# EAGLE board BadUSB-Panel (EAGLE 9.3.0), part 1 of 2
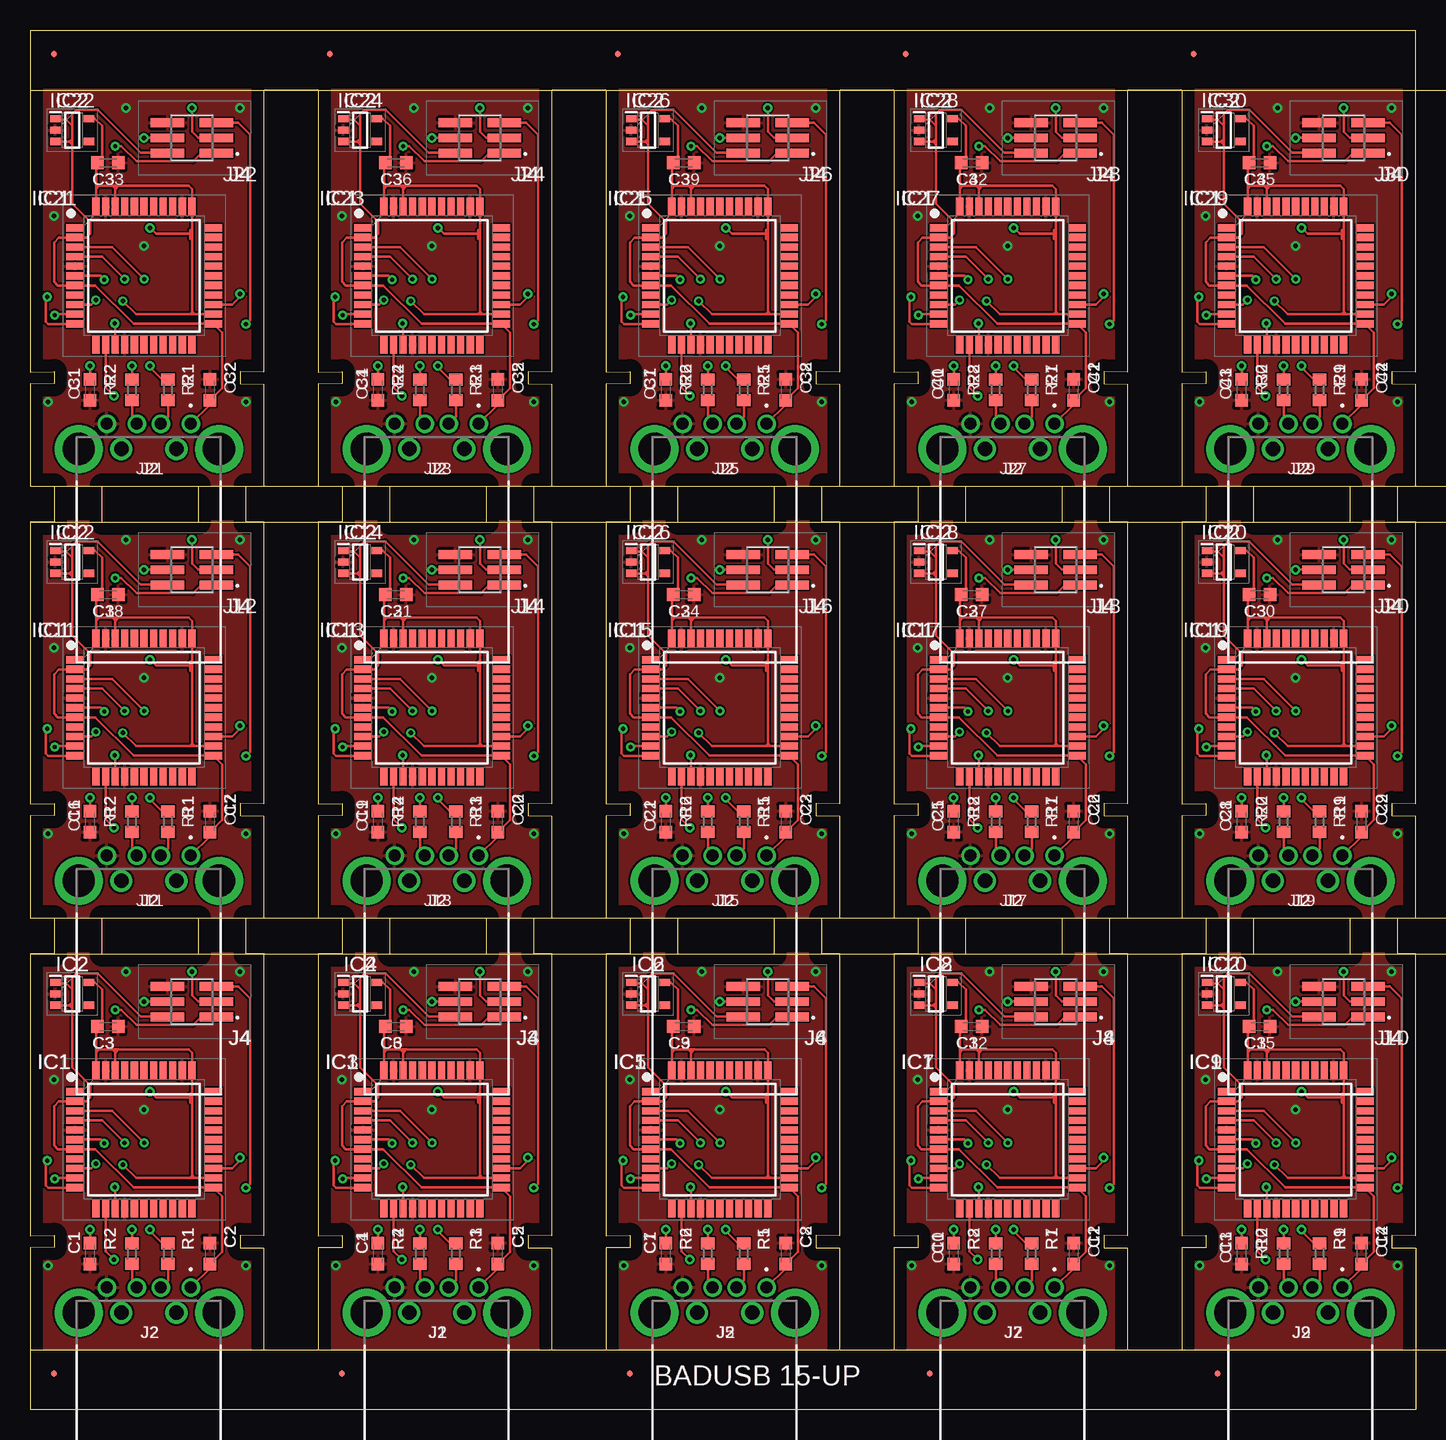
[diagram p0: board, top side]
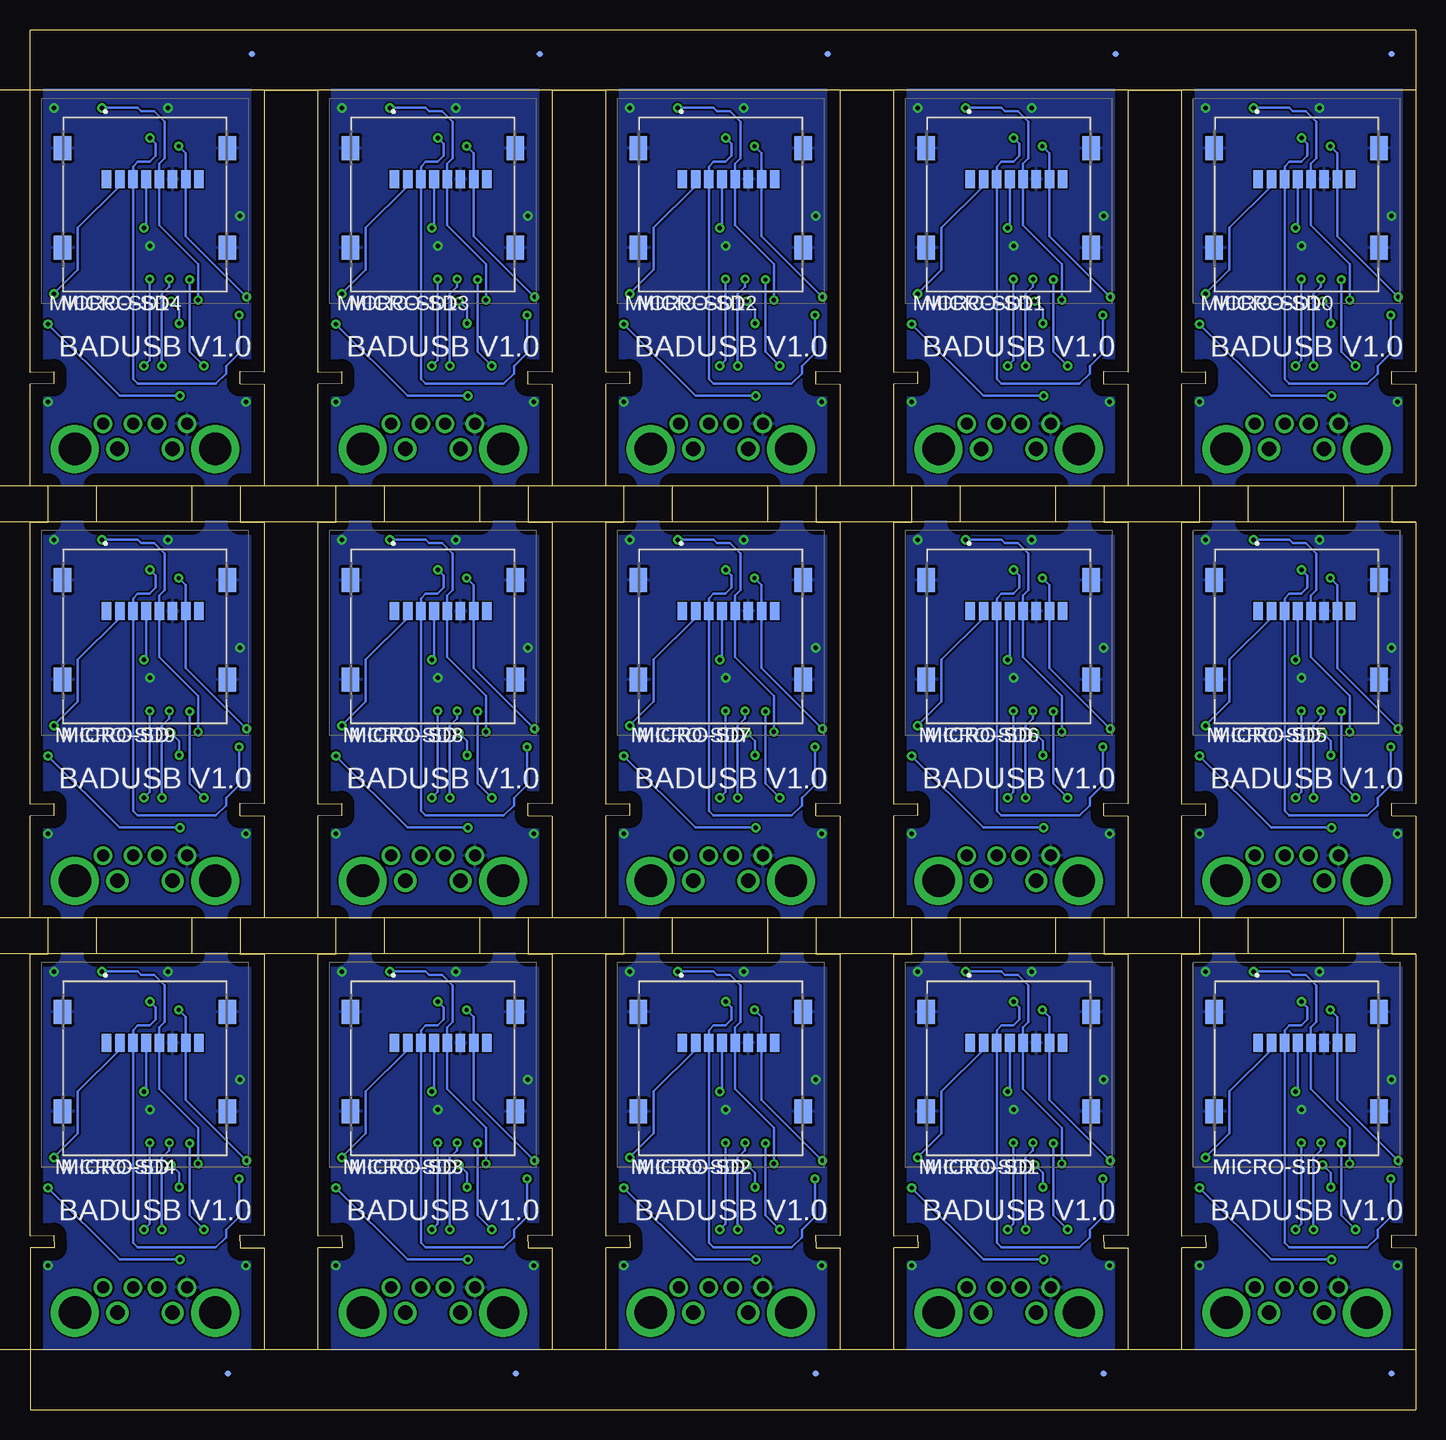
[diagram p1: board, bottom side, seen from below]

Size 115.5 x 115 mm. Coordinates in mm from the lower left corner, seen from the top.
Outline: 19.5,14.5 17.5,14.5 17.5,13.5 19.5,13.5 19.5,5 24,5 24,13.5 26,13.5 26,14.5 24,14.5 24,38 26,38 26,41 24,41 24,49.5 26,49.5 26,50.5 24,50.5 24,74 26,74 26,77 24,77 24,85.5 26,85.5 26,86.5 24,86.5 24,110 19.5,110 19.5,86.5 17.5,86.5 17.5,85.5 19.5,85.5 19.5,77 18,77 18,74 19.5,74 19.5,50.5 17.5,50.5 17.5,49.5 19.5,49.5 19.5,41 18,41 18,38 19.5,38 19.5,14.5
Outline: 0,14.5 2,14.5 2,13.5 0,13.5 0,0 115.5,0 115.5,13.5 113.5,13.5 113.5,14.5 115.5,14.5 115.5,38 114,38 114,41 115.5,41 115.5,49.5 113.5,49.5 113.5,50.5 115.5,50.5 115.5,74 114,74 114,77 115.5,77 115.5,85.5 113.5,85.5 113.5,86.5 115.5,86.5 115.5,115 0,115 0,86.5 2,86.5 2,85.5 0,85.5 0,77 2,77 2,74 0,74 0,50.5 2,50.5 2,49.5 0,49.5 0,41 2,41 2,38 0,38 0,14.5
Outline: 43.5,14.5 41.5,14.5 41.5,13.5 43.5,13.5 43.5,5 48,5 48,13.5 50,13.5 50,14.5 48,14.5 48,38 50,38 50,41 48,41 48,49.5 50,49.5 50,50.5 48,50.5 48,74 50,74 50,77 48,77 48,85.5 50,85.5 50,86.5 48,86.5 48,110 43.5,110 43.5,86.5 41.5,86.5 41.5,85.5 43.5,85.5 43.5,77 42,77 42,74 43.5,74 43.5,50.5 41.5,50.5 41.5,49.5 43.5,49.5 43.5,41 42,41 42,38 43.5,38 43.5,14.5
Outline: 67.5,14.5 65.5,14.5 65.5,13.5 67.5,13.5 67.5,5 72,5 72,13.5 74,13.5 74,14.5 72,14.5 72,38 74,38 74,41 72,41 72,49.5 74,49.5 74,50.5 72,50.5 72,74 74,74 74,77 72,77 72,85.5 74,85.5 74,86.5 72,86.5 72,110 67.5,110 67.5,86.5 65.5,86.5 65.5,85.5 67.5,85.5 67.5,77 66,77 66,74 67.5,74 67.5,50.5 65.5,50.5 65.5,49.5 67.5,49.5 67.5,41 66,41 66,38 67.5,38 67.5,14.5
Outline: 91.5,14.5 89.5,14.5 89.5,13.5 91.5,13.5 91.5,5 96,5 96,13.5 98,13.5 98,14.5 96,14.5 96,38 98,38 98,41 96,41 96,49.5 98,49.5 98,50.5 96,50.5 96,74 98,74 98,77 96,77 96,85.5 98,85.5 98,86.5 96,86.5 96,110 91.5,110 91.5,86.5 89.5,86.5 89.5,85.5 91.5,85.5 91.5,77 90,77 90,74 91.5,74 91.5,50.5 89.5,50.5 89.5,49.5 91.5,49.5 91.5,41 90,41 90,38 91.5,38 91.5,14.5
Outline: 6,74 6,77 14,77 14,74 6,74
Outline: 6,38 6,41 14,41 14,38 6,38
Outline: 30,74 30,77 38,77 38,74 30,74
Outline: 30,38 30,41 38,41 38,38 30,38
Outline: 54,74 54,77 62,77 62,74 54,74
Outline: 54,38 54,41 62,41 62,38 54,38
Outline: 78,74 78,77 86,77 86,74 78,74
Outline: 78,38 78,41 86,41 86,38 78,38
Outline: 102,38 102,41 110,41 110,38 102,38
Outline: 102,74 102,77 110,77 110,74 102,74
Copper layers (1*16): Top 0.035mm / dielectric 1.5mm / Bottom 0.035mm
Design rules "default": minimum track width 6mil, minimum drill 0.35mm, track to track 6mil, track to pad 6mil, pad to pad 6mil, via to via 6mil, smd to smd 6mil, copper to edge 40mil, drill to drill 6mil, minimum pad ring 10mil, minimum via ring 8mil, stop-mask expansion 4mil, vias tented up to drill 0mil, thermal gap 10mil
Milling: 6 lines

## Footprints (pad centres in the part's own frame; a part is rotated, then mirrored left to right if it is on the bottom)
C0603K = smd 1.05 x 1.08: 1 -0.875,0; 2 0.875,0
FID_020 = smd 0.508 x 0.508 bottom: FIDB 0,0 | smd 0.508 x 0.508: FIDT 0,0
QFP80P1200X1200X120-44N = smd 1.5 x 0.6: 1 -5.75,4; 2 -5.75,3.2; 3 -5.75,2.4; 4 -5.75,1.6; 5 -5.75,0.8; 6 -5.75,0; 7 -5.75,-0.8; 8 -5.75,-1.6; 9 -5.75,-2.4; 10 -5.75,-3.2; 11 -5.75,-4; 23 5.75,-4; 24 5.75,-3.2; 25 5.75,-2.4; 26 5.75,-1.6; 27 5.75,-0.8; 28 5.75,0; 29 5.75,0.8; 30 5.75,1.6; 31 5.75,2.4; 32 5.75,3.2; 33 5.75,4 | smd 0.6 x 1.5: 12 -4,-5.75; 13 -3.2,-5.75; 14 -2.4,-5.75; 15 -1.6,-5.75; 16 -0.8,-5.75; 17 0,-5.75; 18 0.8,-5.75; 19 1.6,-5.75; 20 2.4,-5.75; 21 3.2,-5.75; 22 4,-5.75; 34 4,5.75; 35 3.2,5.75; 36 2.4,5.75; 37 1.6,5.75; 38 0.8,5.75; 39 0,5.75; 40 -0.8,5.75; 41 -1.6,5.75; 42 -2.4,5.75; 43 -3.2,5.75; 44 -4,5.75
SOT95P280X130-5N = smd 0.9 x 0.6: 1 -1.4,0.95; 2 -1.4,0; 3 -1.4,-0.95; 4 1.4,-0.95; 5 1.4,0.95
UP2-AH-1-TH = drill 1 pad 1.55: 1 3.5,19.9; 2 1,19.9; 3 -1,19.9; 4 -3.5,19.9 | drill 1.2 pad 1.85: 5 -2.3,17.8; 6 2.3,17.8 | drill 2.7 pad 4: 7 5.85,17.8; 8 -5.85,17.8
FTS-103-YY-XX-DV-TR = smd 0.74 x 2.79: 1 -1.27,-2.035; 2 -1.27,2.035; 3 0,-2.035; 4 0,2.035; 5 1.27,-2.035; 6 1.27,2.035
472192001 = smd 0.8 x 1.5: 1 3.205,-1.8; 2 2.105,-1.8; 3 1.005,-1.8; 4 -0.095,-1.8; 5 -1.195,-1.8; 6 -2.295,-1.8; 7 -3.395,-1.8; 8 -4.495,-1.8 | smd 1.45 x 2: 9 -6.875,-4.4; 10 -6.875,3.9; 11 6.875,3.9; 12 6.875,-4.4
R0603 = smd 1 x 1.1: 1 -0.85,0; 2 0.85,0

## Placement (x,y rotation side)
C1  1uF  [C0603K]  5,13 270 top
C2  10uF  [C0603K]  15,13 90 top
C3  10uF  [C0603K]  6.49,31.92 0 top
C4  1uF  [C0603K]  29,13 270 top
C5  10uF  [C0603K]  39,13 90 top
C6  10uF  [C0603K]  30.49,31.92 0 top
C7  1uF  [C0603K]  53,13 270 top
C8  10uF  [C0603K]  63,13 90 top
C9  10uF  [C0603K]  54.49,31.92 0 top
C10  1uF  [C0603K]  77,13 270 top
C11  10uF  [C0603K]  87,13 90 top
C12  10uF  [C0603K]  78.49,31.92 0 top
C13  1uF  [C0603K]  101,13 270 top
C14  10uF  [C0603K]  111,13 90 top
C15  10uF  [C0603K]  102.49,31.92 0 top
C16  1uF  [C0603K]  5,49 270 top
C17  10uF  [C0603K]  15,49 90 top
C18  10uF  [C0603K]  6.49,67.92 0 top
C19  1uF  [C0603K]  29,49 270 top
C20  10uF  [C0603K]  39,49 90 top
C21  10uF  [C0603K]  30.49,67.92 0 top
C22  1uF  [C0603K]  53,49 270 top
C23  10uF  [C0603K]  63,49 90 top
C24  10uF  [C0603K]  54.49,67.92 0 top
C25  1uF  [C0603K]  77,49 270 top
C26  10uF  [C0603K]  87,49 90 top
C27  10uF  [C0603K]  78.49,67.92 0 top
C28  1uF  [C0603K]  101,49 270 top
C29  10uF  [C0603K]  111,49 90 top
C30  10uF  [C0603K]  102.49,67.92 0 top
C31  1uF  [C0603K]  5,85 270 top
C32  10uF  [C0603K]  15,85 90 top
C33  10uF  [C0603K]  6.49,103.92 0 top
C34  1uF  [C0603K]  29,85 270 top
C35  10uF  [C0603K]  39,85 90 top
C36  10uF  [C0603K]  30.49,103.92 0 top
C37  1uF  [C0603K]  53,85 270 top
C38  10uF  [C0603K]  63,85 90 top
C39  10uF  [C0603K]  54.49,103.92 0 top
C40  1uF  [C0603K]  77,85 270 top
C41  10uF  [C0603K]  87,85 90 top
C42  10uF  [C0603K]  78.49,103.92 0 top
C43  1uF  [C0603K]  101,85 270 top
C44  10uF  [C0603K]  111,85 90 top
C45  10uF  [C0603K]  102.49,103.92 0 top
E$1  [FID_020]  2,113 0 top
E$2  [FID_020]  25,113 0 top
E$3  [FID_020]  49,113 0 top
E$4  [FID_020]  73,113 0 top
E$5  [FID_020]  97,113 0 top
E$6  [FID_020]  2,3 0 top
E$7  [FID_020]  26,3 0 top
E$8  [FID_020]  50,3 0 top
E$9  [FID_020]  75,3 0 top
E$10  [FID_020]  99,3 0 top
IC1  ATMEGA32U4-AUR  [QFP80P1200X1200X120-44N]  9.5,22.5 0 top
IC2  XC6219A332MR-G  [SOT95P280X130-5N]  3.52,34.65 0 top
IC3  ATMEGA32U4-AUR  [QFP80P1200X1200X120-44N]  33.5,22.5 0 top
IC4  XC6219A332MR-G  [SOT95P280X130-5N]  27.52,34.65 0 top
IC5  ATMEGA32U4-AUR  [QFP80P1200X1200X120-44N]  57.5,22.5 0 top
IC6  XC6219A332MR-G  [SOT95P280X130-5N]  51.52,34.65 0 top
IC7  ATMEGA32U4-AUR  [QFP80P1200X1200X120-44N]  81.5,22.5 0 top
IC8  XC6219A332MR-G  [SOT95P280X130-5N]  75.52,34.65 0 top
IC9  ATMEGA32U4-AUR  [QFP80P1200X1200X120-44N]  105.5,22.5 0 top
IC10  XC6219A332MR-G  [SOT95P280X130-5N]  99.52,34.65 0 top
IC11  ATMEGA32U4-AUR  [QFP80P1200X1200X120-44N]  9.5,58.5 0 top
IC12  XC6219A332MR-G  [SOT95P280X130-5N]  3.52,70.65 0 top
IC13  ATMEGA32U4-AUR  [QFP80P1200X1200X120-44N]  33.5,58.5 0 top
IC14  XC6219A332MR-G  [SOT95P280X130-5N]  27.52,70.65 0 top
IC15  ATMEGA32U4-AUR  [QFP80P1200X1200X120-44N]  57.5,58.5 0 top
IC16  XC6219A332MR-G  [SOT95P280X130-5N]  51.52,70.65 0 top
IC17  ATMEGA32U4-AUR  [QFP80P1200X1200X120-44N]  81.5,58.5 0 top
IC18  XC6219A332MR-G  [SOT95P280X130-5N]  75.52,70.65 0 top
IC19  ATMEGA32U4-AUR  [QFP80P1200X1200X120-44N]  105.5,58.5 0 top
IC20  XC6219A332MR-G  [SOT95P280X130-5N]  99.52,70.65 0 top
IC21  ATMEGA32U4-AUR  [QFP80P1200X1200X120-44N]  9.5,94.5 0 top
IC22  XC6219A332MR-G  [SOT95P280X130-5N]  3.52,106.65 0 top
IC23  ATMEGA32U4-AUR  [QFP80P1200X1200X120-44N]  33.5,94.5 0 top
IC24  XC6219A332MR-G  [SOT95P280X130-5N]  27.52,106.65 0 top
IC25  ATMEGA32U4-AUR  [QFP80P1200X1200X120-44N]  57.5,94.5 0 top
IC26  XC6219A332MR-G  [SOT95P280X130-5N]  51.52,106.65 0 top
IC27  ATMEGA32U4-AUR  [QFP80P1200X1200X120-44N]  81.5,94.5 0 top
IC28  XC6219A332MR-G  [SOT95P280X130-5N]  75.52,106.65 0 top
IC29  ATMEGA32U4-AUR  [QFP80P1200X1200X120-44N]  105.5,94.5 0 top
IC30  XC6219A332MR-G  [SOT95P280X130-5N]  99.52,106.65 0 top
J1  UP2-AH-1-TH  [UP2-AH-1-TH]  33.91,-9.73 0 top
J2  UP2-AH-1-TH  [UP2-AH-1-TH]  9.91,-9.73 0 top
J3  FTS-103-01-L-DV-TR  [FTS-103-YY-XX-DV-TR]  37.5,34 90 top
J4  FTS-103-01-L-DV-TR  [FTS-103-YY-XX-DV-TR]  13.5,34 90 top
J5  UP2-AH-1-TH  [UP2-AH-1-TH]  57.91,-9.73 0 top
J6  FTS-103-01-L-DV-TR  [FTS-103-YY-XX-DV-TR]  61.5,34 90 top
J7  UP2-AH-1-TH  [UP2-AH-1-TH]  81.91,-9.73 0 top
J8  FTS-103-01-L-DV-TR  [FTS-103-YY-XX-DV-TR]  85.5,34 90 top
J9  UP2-AH-1-TH  [UP2-AH-1-TH]  105.91,-9.73 0 top
J10  FTS-103-01-L-DV-TR  [FTS-103-YY-XX-DV-TR]  109.5,34 90 top
J11  UP2-AH-1-TH  [UP2-AH-1-TH]  9.91,26.27 0 top
J12  FTS-103-01-L-DV-TR  [FTS-103-YY-XX-DV-TR]  13.5,70 90 top
J13  UP2-AH-1-TH  [UP2-AH-1-TH]  33.91,26.27 0 top
J14  FTS-103-01-L-DV-TR  [FTS-103-YY-XX-DV-TR]  37.5,70 90 top
J15  UP2-AH-1-TH  [UP2-AH-1-TH]  57.91,26.27 0 top
J16  FTS-103-01-L-DV-TR  [FTS-103-YY-XX-DV-TR]  61.5,70 90 top
J17  UP2-AH-1-TH  [UP2-AH-1-TH]  81.91,26.27 0 top
J18  FTS-103-01-L-DV-TR  [FTS-103-YY-XX-DV-TR]  85.5,70 90 top
J19  UP2-AH-1-TH  [UP2-AH-1-TH]  105.91,26.27 0 top
J20  FTS-103-01-L-DV-TR  [FTS-103-YY-XX-DV-TR]  109.5,70 90 top
J21  UP2-AH-1-TH  [UP2-AH-1-TH]  9.91,62.27 0 top
J22  FTS-103-01-L-DV-TR  [FTS-103-YY-XX-DV-TR]  13.5,106 90 top
J23  UP2-AH-1-TH  [UP2-AH-1-TH]  33.91,62.27 0 top
J24  FTS-103-01-L-DV-TR  [FTS-103-YY-XX-DV-TR]  37.5,106 90 top
J25  UP2-AH-1-TH  [UP2-AH-1-TH]  57.91,62.27 0 top
J26  FTS-103-01-L-DV-TR  [FTS-103-YY-XX-DV-TR]  61.5,106 90 top
J27  UP2-AH-1-TH  [UP2-AH-1-TH]  81.91,62.27 0 top
J28  FTS-103-01-L-DV-TR  [FTS-103-YY-XX-DV-TR]  85.5,106 90 top
J29  UP2-AH-1-TH  [UP2-AH-1-TH]  105.91,62.27 0 top
J30  FTS-103-01-L-DV-TR  [FTS-103-YY-XX-DV-TR]  109.5,106 90 top
MICRO-SD  47219-2001  [472192001]  9.91,28.75 180 bottom
MICRO-SD1  47219-2001  [472192001]  33.91,28.75 180 bottom
MICRO-SD2  47219-2001  [472192001]  57.91,28.75 180 bottom
MICRO-SD3  47219-2001  [472192001]  81.91,28.75 180 bottom
MICRO-SD4  47219-2001  [472192001]  105.91,28.75 180 bottom
MICRO-SD5  47219-2001  [472192001]  9.91,64.75 180 bottom
MICRO-SD6  47219-2001  [472192001]  33.91,64.75 180 bottom
MICRO-SD7  47219-2001  [472192001]  57.91,64.75 180 bottom
MICRO-SD8  47219-2001  [472192001]  81.91,64.75 180 bottom
MICRO-SD9  47219-2001  [472192001]  105.91,64.75 180 bottom
MICRO-SD10  47219-2001  [472192001]  9.91,100.75 180 bottom
MICRO-SD11  47219-2001  [472192001]  33.91,100.75 180 bottom
MICRO-SD12  47219-2001  [472192001]  57.91,100.75 180 bottom
MICRO-SD13  47219-2001  [472192001]  81.91,100.75 180 bottom
MICRO-SD14  47219-2001  [472192001]  105.91,100.75 180 bottom
R1  22R  [R0603]  11.5,13 270 top
R2  22R  [R0603]  8.5,13 90 top
R3  22R  [R0603]  35.5,13 270 top
R4  22R  [R0603]  32.5,13 90 top
R5  22R  [R0603]  59.5,13 270 top
R6  22R  [R0603]  56.5,13 90 top
R7  22R  [R0603]  83.5,13 270 top
R8  22R  [R0603]  80.5,13 90 top
R9  22R  [R0603]  107.5,13 270 top
R10  22R  [R0603]  104.5,13 90 top
R11  22R  [R0603]  11.5,49 270 top
R12  22R  [R0603]  8.5,49 90 top
R13  22R  [R0603]  35.5,49 270 top
R14  22R  [R0603]  32.5,49 90 top
R15  22R  [R0603]  59.5,49 270 top
R16  22R  [R0603]  56.5,49 90 top
R17  22R  [R0603]  83.5,49 270 top
R18  22R  [R0603]  80.5,49 90 top
R19  22R  [R0603]  107.5,49 270 top
R20  22R  [R0603]  104.5,49 90 top
R21  22R  [R0603]  11.5,85 270 top
R22  22R  [R0603]  8.5,85 90 top
R23  22R  [R0603]  35.5,85 270 top
R24  22R  [R0603]  32.5,85 90 top
R25  22R  [R0603]  59.5,85 270 top
R26  22R  [R0603]  56.5,85 90 top
R27  22R  [R0603]  83.5,85 270 top
R28  22R  [R0603]  80.5,85 90 top
R29  22R  [R0603]  107.5,85 270 top
R30  22R  [R0603]  104.5,85 90 top

## Library data of the parts
C1-C45 = rcl; SPICEPREFIX: C
E$1-E$10 = fid
IC1 IC3 IC5 IC7 IC9 IC11 IC13 IC15 IC17 IC19 IC21 IC23 IC25 IC27 IC29 = ATMEGA32U4-AUR; ARROW_PART_NUMBER: ATMEGA32U4-AUR; ARROW_PRICE-STOCK: https://www.arrow.com/en/products/atmega32u4-aur/microchip-technology; DESCRIPTION: 8-bit Microcontrollers - MCU USB 32K Flash 16 MHz; HEIGHT: 1.2mm; MANUFACTURER_NAME: Microchip; MANUFACTURER_PART_NUMBER: ATMEGA32U4-AUR; MOUSER_PART_NUMBER: 556-ATMEGA32U4-AUR; MOUSER_PRICE-STOCK: https://www.mouser.co.uk/ProductDetail/Microchip-Technology-Atmel/ATMEGA32U4-AUR?qs=rBGENRD8NwIbVIAimLns%252BA%3D%3D
IC2 IC4 IC6 IC8 IC10 IC12 IC14 IC16 IC18 IC20 IC22 IC24 IC26 IC28 IC30 = XC6219A332MR-G; DESCRIPTION: LDO Voltage Regulators 300mA High Speed Votage Regulator; HEIGHT: 1.3mm; MANUFACTURER_NAME: Torex; MANUFACTURER_PART_NUMBER: XC6219A332MR-G; MOUSER_PART_NUMBER: 865-XC6219A332MR-G; MOUSER_PRICE-STOCK: https://www.mouser.co.uk/ProductDetail/Torex-Semiconductor/XC6219A332MR-G?qs=AsjdqWjXhJ%2FqZhqmpYowVg%3D%3D
J1 J2 J5 J7 J9 J11 J13 J15 J17 J19 J21 J23 J25 J27 J29 = UP2-AH-1-TH; ARROW_PART_NUMBER: UP2-AH-1-TH; ARROW_PRICE-STOCK: https://www.arrow.com/en/products/up2-ah-1-th/cui-devices; DESCRIPTION: USB Connectors USB 2.0 type A plug 4 pin Horizontal TH; HEIGHT: mm; MANUFACTURER_NAME: CUI Devices; MANUFACTURER_PART_NUMBER: UP2-AH-1-TH; MOUSER_PART_NUMBER: 490-UP2-AH-1-TH; MOUSER_PRICE-STOCK: https://www.mouser.co.uk/ProductDetail/CUI-Devices/UP2-AH-1-TH?qs=5mqXD9RfOg0slNuu3mCk4w%3D%3D
J3 J4 J6 J8 J10 J12 J14 J16 J18 J20 J22 J24 J26 J28 J30 = FTS-103-01-L-DV-TR; ARROW_PART_NUMBER: FTS-103-01-L-DV-TR; ARROW_PRICE-STOCK: https://www.arrow.com/en/products/fts-103-01-l-dv-tr/samtec; DESCRIPTION: 6 Position, Micro Low Profile Header Strip, Double-Row, Vertical Surface Mount; HEIGHT: mm; MANUFACTURER_NAME: SAMTEC; MANUFACTURER_PART_NUMBER: FTS-103-01-L-DV-TR; MOUSER_PART_NUMBER: 200-FTS10301LDVTR; MOUSER_PRICE-STOCK: https://www.mouser.co.uk/ProductDetail/Samtec/FTS-103-01-L-DV-TR?qs=0lQeLiL1qyZdQ0modVbSfg%3D%3D
MICRO-SD MICRO-SD1-MICRO-SD14 = 47219-2001; DESCRIPTION: Molex 47219 Series 8 Way Horizontal Hinged Micro SD Memory Card Connector with Solder Termination; HEIGHT: mm; MANUFACTURER_NAME: Molex; MANUFACTURER_PART_NUMBER: 47219-2001; MOUSER_PART_NUMBER: 538-47219-2001; MOUSER_PRICE-STOCK: https://www.mouser.co.uk/ProductDetail/Molex/47219-2001?qs=6kT3pPPHxnVaoXw6Dd7beQ%3D%3D
R1-R30 = rcl; SPICEPREFIX: R

## Nets
+3V1: C6.1 IC3.14 IC3.24 IC3.34 IC3.42 IC3.44 IC4.5 MICRO-SD1.4
+3V2: C9.1 IC5.14 IC5.24 IC5.34 IC5.42 IC5.44 IC6.5 MICRO-SD2.4
+3V3: C3.1 IC1.14 IC1.24 IC1.34 IC1.42 IC1.44 IC2.5 MICRO-SD.4
+3V4: C12.1 IC7.14 IC7.24 IC7.34 IC7.42 IC7.44 IC8.5 MICRO-SD3.4
+3V5: C15.1 IC9.14 IC9.24 IC9.34 IC9.42 IC9.44 IC10.5 MICRO-SD4.4
+3V6: C18.1 IC11.14 IC11.24 IC11.34 IC11.42 IC11.44 IC12.5 MICRO-SD5.4
+3V7: C21.1 IC13.14 IC13.24 IC13.34 IC13.42 IC13.44 IC14.5 MICRO-SD6.4
+3V8: C24.1 IC15.14 IC15.24 IC15.34 IC15.42 IC15.44 IC16.5 MICRO-SD7.4
+3V9: C27.1 IC17.14 IC17.24 IC17.34 IC17.42 IC17.44 IC18.5 MICRO-SD8.4
+3V10: C30.1 IC19.14 IC19.24 IC19.34 IC19.42 IC19.44 IC20.5 MICRO-SD9.4
+3V11: C33.1 IC21.14 IC21.24 IC21.34 IC21.42 IC21.44 IC22.5 MICRO-SD10.4
+3V12: C36.1 IC23.14 IC23.24 IC23.34 IC23.42 IC23.44 IC24.5 MICRO-SD11.4
+3V13: C39.1 IC25.14 IC25.24 IC25.34 IC25.42 IC25.44 IC26.5 MICRO-SD12.4
+3V14: C42.1 IC27.14 IC27.24 IC27.34 IC27.42 IC27.44 IC28.5 MICRO-SD13.4
+3V15: C45.1 IC29.14 IC29.24 IC29.34 IC29.42 IC29.44 IC30.5 MICRO-SD14.4
+5V: C2.1 IC1.2 IC1.7 IC1.23 IC2.1 IC2.3 J2.1 J4.2
+5V1: C5.1 IC3.2 IC3.7 IC3.23 IC4.1 IC4.3 J1.1 J3.2
+5V2: C8.1 IC5.2 IC5.7 IC5.23 IC6.1 IC6.3 J5.1 J6.2
+5V3: C11.1 IC7.2 IC7.7 IC7.23 IC8.1 IC8.3 J7.1 J8.2
+5V4: C14.1 IC9.2 IC9.7 IC9.23 IC10.1 IC10.3 J9.1 J10.2
+5V5: C17.1 IC11.2 IC11.7 IC11.23 IC12.1 IC12.3 J11.1 J12.2
+5V6: C20.1 IC13.2 IC13.7 IC13.23 IC14.1 IC14.3 J13.1 J14.2
+5V7: C23.1 IC15.2 IC15.7 IC15.23 IC16.1 IC16.3 J15.1 J16.2
+5V8: C26.1 IC17.2 IC17.7 IC17.23 IC18.1 IC18.3 J17.1 J18.2
+5V9: C29.1 IC19.2 IC19.7 IC19.23 IC20.1 IC20.3 J19.1 J20.2
+5V10: C32.1 IC21.2 IC21.7 IC21.23 IC22.1 IC22.3 J21.1 J22.2
+5V11: C35.1 IC23.2 IC23.7 IC23.23 IC24.1 IC24.3 J23.1 J24.2
+5V12: C38.1 IC25.2 IC25.7 IC25.23 IC26.1 IC26.3 J25.1 J26.2
+5V13: C41.1 IC27.2 IC27.7 IC27.23 IC28.1 IC28.3 J27.1 J28.2
+5V14: C44.1 IC29.2 IC29.7 IC29.23 IC30.1 IC30.3 J29.1 J30.2
CS: IC1.25 MICRO-SD.2
CS1: IC3.25 MICRO-SD1.2
CS2: IC5.25 MICRO-SD2.2
CS3: IC7.25 MICRO-SD3.2
CS4: IC9.25 MICRO-SD4.2
CS5: IC11.25 MICRO-SD5.2
CS6: IC13.25 MICRO-SD6.2
CS7: IC15.25 MICRO-SD7.2
CS8: IC17.25 MICRO-SD8.2
CS9: IC19.25 MICRO-SD9.2
CS10: IC21.25 MICRO-SD10.2
CS11: IC23.25 MICRO-SD11.2
CS12: IC25.25 MICRO-SD12.2
CS13: IC27.25 MICRO-SD13.2
CS14: IC29.25 MICRO-SD14.2
D+: IC1.4 R2.2
D+1: IC3.4 R4.2
D+2: IC5.4 R6.2
D+3: IC7.4 R8.2
D+4: IC9.4 R10.2
D+5: IC11.4 R12.2
D+6: IC13.4 R14.2
D+7: IC15.4 R16.2
D+8: IC17.4 R18.2
D+9: IC19.4 R20.2
D+10: IC21.4 R22.2
D+11: IC23.4 R24.2
D+12: IC25.4 R26.2
D+13: IC27.4 R28.2
D+14: IC29.4 R30.2
D-: IC1.3 R1.1
D-1: IC3.3 R3.1
D-2: IC5.3 R5.1
D-3: IC7.3 R7.1
D-4: IC9.3 R9.1
D-5: IC11.3 R11.1
D-6: IC13.3 R13.1
D-7: IC15.3 R15.1
D-8: IC17.3 R17.1
D-9: IC19.3 R19.1
D-10: IC21.3 R21.1
D-11: IC23.3 R23.1
D-12: IC25.3 R25.1
D-13: IC27.3 R27.1
D-14: IC29.3 R29.1
GND: C1.2 C2.2 C3.2 IC1.5 IC1.15 IC1.35 IC1.43 IC2.2 J2.4 J4.6 MICRO-SD.6 MICRO-SD.9 MICRO-SD.10 MICRO-SD.11 MICRO-SD.12
GND1: C4.2 C5.2 C6.2 IC3.5 IC3.15 IC3.35 IC3.43 IC4.2 J1.4 J3.6 MICRO-SD1.6 MICRO-SD1.9 MICRO-SD1.10 MICRO-SD1.11 MICRO-SD1.12
GND2: C7.2 C8.2 C9.2 IC5.5 IC5.15 IC5.35 IC5.43 IC6.2 J5.4 J6.6 MICRO-SD2.6 MICRO-SD2.9 MICRO-SD2.10 MICRO-SD2.11 MICRO-SD2.12
GND3: C10.2 C11.2 C12.2 IC7.5 IC7.15 IC7.35 IC7.43 IC8.2 J7.4 J8.6 MICRO-SD3.6 MICRO-SD3.9 MICRO-SD3.10 MICRO-SD3.11 MICRO-SD3.12
GND4: C13.2 C14.2 C15.2 IC9.5 IC9.15 IC9.35 IC9.43 IC10.2 J9.4 J10.6 MICRO-SD4.6 MICRO-SD4.9 MICRO-SD4.10 MICRO-SD4.11 MICRO-SD4.12
GND5: C16.2 C17.2 C18.2 IC11.5 IC11.15 IC11.35 IC11.43 IC12.2 J11.4 J12.6 MICRO-SD5.6 MICRO-SD5.9 MICRO-SD5.10 MICRO-SD5.11 MICRO-SD5.12
GND6: C19.2 C20.2 C21.2 IC13.5 IC13.15 IC13.35 IC13.43 IC14.2 J13.4 J14.6 MICRO-SD6.6 MICRO-SD6.9 MICRO-SD6.10 MICRO-SD6.11 MICRO-SD6.12
GND7: C22.2 C23.2 C24.2 IC15.5 IC15.15 IC15.35 IC15.43 IC16.2 J15.4 J16.6 MICRO-SD7.6 MICRO-SD7.9 MICRO-SD7.10 MICRO-SD7.11 MICRO-SD7.12
GND8: C25.2 C26.2 C27.2 IC17.5 IC17.15 IC17.35 IC17.43 IC18.2 J17.4 J18.6 MICRO-SD8.6 MICRO-SD8.9 MICRO-SD8.10 MICRO-SD8.11 MICRO-SD8.12
GND9: C28.2 C29.2 C30.2 IC19.5 IC19.15 IC19.35 IC19.43 IC20.2 J19.4 J20.6 MICRO-SD9.6 MICRO-SD9.9 MICRO-SD9.10 MICRO-SD9.11 MICRO-SD9.12
GND10: C31.2 C32.2 C33.2 IC21.5 IC21.15 IC21.35 IC21.43 IC22.2 J21.4 J22.6 MICRO-SD10.6 MICRO-SD10.9 MICRO-SD10.10 MICRO-SD10.11 MICRO-SD10.12
GND11: C34.2 C35.2 C36.2 IC23.5 IC23.15 IC23.35 IC23.43 IC24.2 J23.4 J24.6 MICRO-SD11.6 MICRO-SD11.9 MICRO-SD11.10 MICRO-SD11.11 MICRO-SD11.12
GND12: C37.2 C38.2 C39.2 IC25.5 IC25.15 IC25.35 IC25.43 IC26.2 J25.4 J26.6 MICRO-SD12.6 MICRO-SD12.9 MICRO-SD12.10 MICRO-SD12.11 MICRO-SD12.12
GND13: C40.2 C41.2 C42.2 IC27.5 IC27.15 IC27.35 IC27.43 IC28.2 J27.4 J28.6 MICRO-SD13.6 MICRO-SD13.9 MICRO-SD13.10 MICRO-SD13.11 MICRO-SD13.12
GND14: C43.2 C44.2 C45.2 IC29.5 IC29.15 IC29.35 IC29.43 IC30.2 J29.4 J30.6 MICRO-SD14.6 MICRO-SD14.9 MICRO-SD14.10 MICRO-SD14.11 MICRO-SD14.12
MISO: IC1.11 J4.1 MICRO-SD.7
MISO1: IC3.11 J3.1 MICRO-SD1.7
MISO2: IC5.11 J6.1 MICRO-SD2.7
MISO3: IC7.11 J8.1 MICRO-SD3.7
MISO4: IC9.11 J10.1 MICRO-SD4.7
MISO5: IC11.11 J12.1 MICRO-SD5.7
MISO6: IC13.11 J14.1 MICRO-SD6.7
MISO7: IC15.11 J16.1 MICRO-SD7.7
MISO8: IC17.11 J18.1 MICRO-SD8.7
MISO9: IC19.11 J20.1 MICRO-SD9.7
MISO10: IC21.11 J22.1 MICRO-SD10.7
MISO11: IC23.11 J24.1 MICRO-SD11.7
MISO12: IC25.11 J26.1 MICRO-SD12.7
MISO13: IC27.11 J28.1 MICRO-SD13.7
MISO14: IC29.11 J30.1 MICRO-SD14.7
MOSI: IC1.10 J4.4 MICRO-SD.3
MOSI1: IC3.10 J3.4 MICRO-SD1.3
MOSI2: IC5.10 J6.4 MICRO-SD2.3
MOSI3: IC7.10 J8.4 MICRO-SD3.3
MOSI4: IC9.10 J10.4 MICRO-SD4.3
MOSI5: IC11.10 J12.4 MICRO-SD5.3
MOSI6: IC13.10 J14.4 MICRO-SD6.3
MOSI7: IC15.10 J16.4 MICRO-SD7.3
MOSI8: IC17.10 J18.4 MICRO-SD8.3
MOSI9: IC19.10 J20.4 MICRO-SD9.3
MOSI10: IC21.10 J22.4 MICRO-SD10.3
MOSI11: IC23.10 J24.4 MICRO-SD11.3
MOSI12: IC25.10 J26.4 MICRO-SD12.3
MOSI13: IC27.10 J28.4 MICRO-SD13.3
MOSI14: IC29.10 J30.4 MICRO-SD14.3
N$1: C4.1 IC3.6
N$2: J2.2 R1.2
N$3: J2.3 R2.1
N$4: J1.2 R3.2
N$5: C1.1 IC1.6
N$6: J1.3 R4.1
N$7: C7.1 IC5.6
N$8: J5.2 R5.2
N$9: J5.3 R6.1
N$10: C10.1 IC7.6
N$11: J7.2 R7.2
N$12: J7.3 R8.1
N$13: C13.1 IC9.6
N$14: J9.2 R9.2
N$15: J9.3 R10.1
N$16: C16.1 IC11.6
N$17: J11.2 R11.2
N$18: J11.3 R12.1
N$19: C19.1 IC13.6
N$20: J13.2 R13.2
N$21: J13.3 R14.1
N$22: C22.1 IC15.6
N$23: J15.2 R15.2
N$24: J15.3 R16.1
N$25: C25.1 IC17.6
N$26: J17.2 R17.2
N$27: J17.3 R18.1
N$28: C28.1 IC19.6
N$29: J19.2 R19.2
N$30: J19.3 R20.1
N$31: C31.1 IC21.6
N$32: J21.2 R21.2
N$33: J21.3 R22.1
N$34: C34.1 IC23.6
N$35: J23.2 R23.2
N$36: J23.3 R24.1
N$37: C37.1 IC25.6
N$38: J25.2 R25.2
N$39: J25.3 R26.1
N$40: C40.1 IC27.6
N$41: J27.2 R27.2
N$42: J27.3 R28.1
N$43: C43.1 IC29.6
N$44: J29.2 R29.2
N$45: J29.3 R30.1
RESET: IC1.13 J4.5
RESET1: IC3.13 J3.5
RESET2: IC5.13 J6.5
RESET3: IC7.13 J8.5
RESET4: IC9.13 J10.5
RESET5: IC11.13 J12.5
RESET6: IC13.13 J14.5
RESET7: IC15.13 J16.5
RESET8: IC17.13 J18.5
RESET9: IC19.13 J20.5
RESET10: IC21.13 J22.5
RESET11: IC23.13 J24.5
RESET12: IC25.13 J26.5
RESET13: IC27.13 J28.5
RESET14: IC29.13 J30.5
SCK: IC1.9 J4.3 MICRO-SD.5
SCK1: IC3.9 J3.3 MICRO-SD1.5
SCK2: IC5.9 J6.3 MICRO-SD2.5
SCK3: IC7.9 J8.3 MICRO-SD3.5
SCK4: IC9.9 J10.3 MICRO-SD4.5
SCK5: IC11.9 J12.3 MICRO-SD5.5
SCK6: IC13.9 J14.3 MICRO-SD6.5
SCK7: IC15.9 J16.3 MICRO-SD7.5
SCK8: IC17.9 J18.3 MICRO-SD8.5
SCK9: IC19.9 J20.3 MICRO-SD9.5
SCK10: IC21.9 J22.3 MICRO-SD10.5
SCK11: IC23.9 J24.3 MICRO-SD11.5
SCK12: IC25.9 J26.3 MICRO-SD12.5
SCK13: IC27.9 J28.3 MICRO-SD13.5
SCK14: IC29.9 J30.3 MICRO-SD14.5